# EAGLE board sensor (EAGLE 9.6.2)
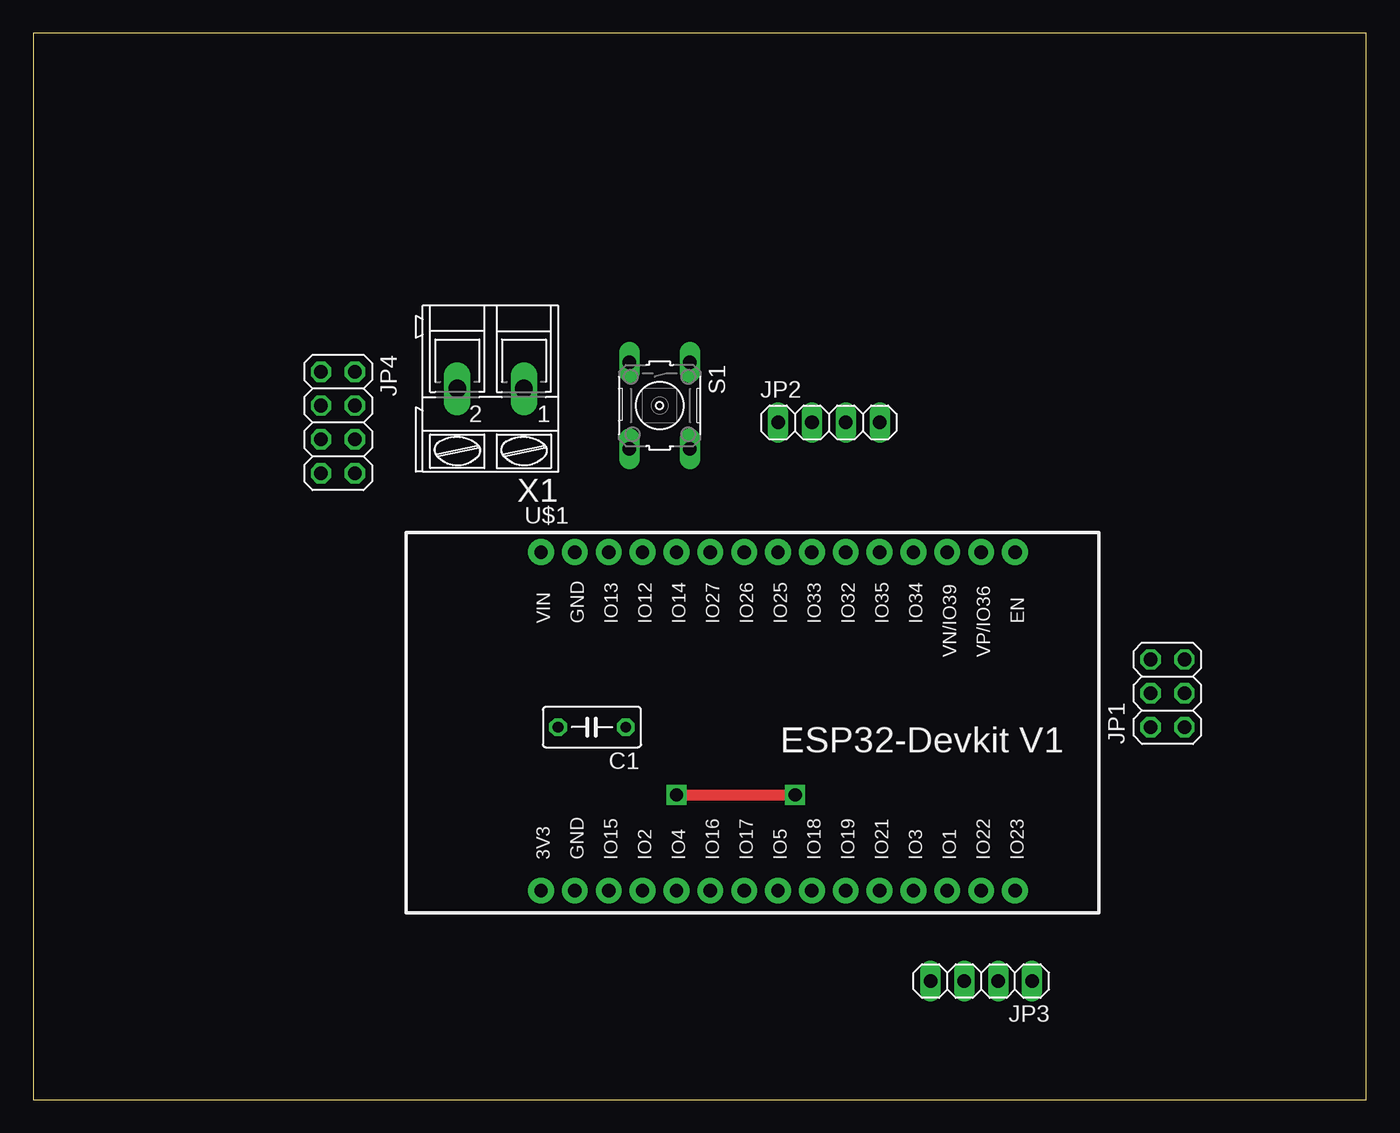
[diagram p0: board, top side]
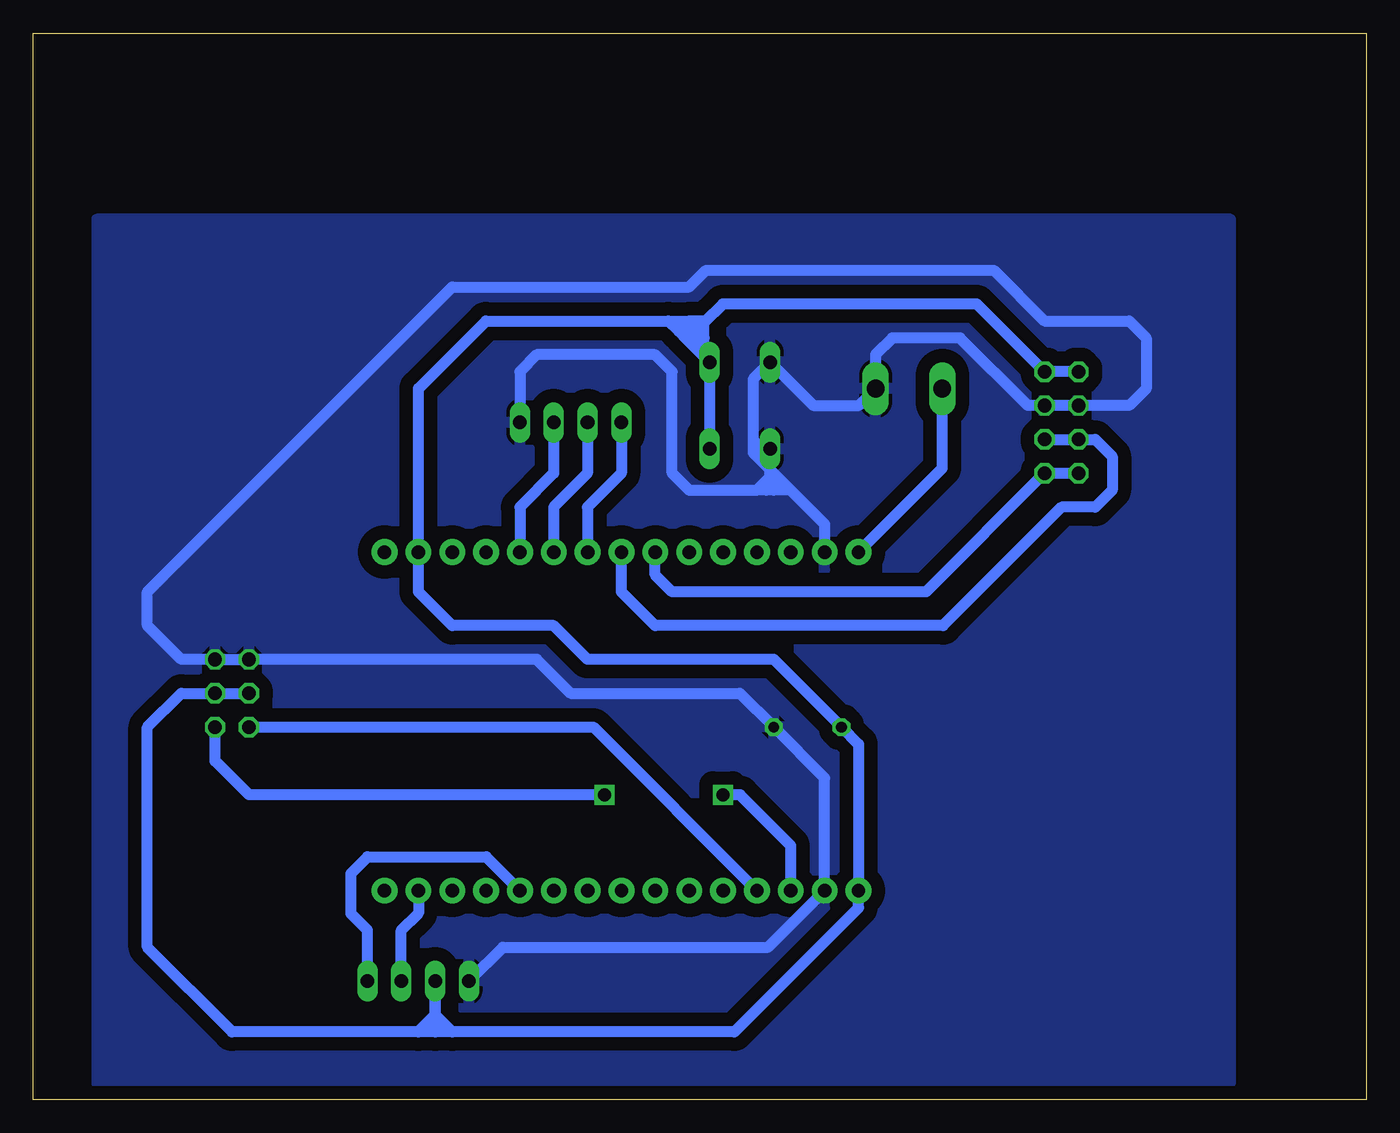
[diagram p1: board, bottom side, seen from below]

Size 100 x 80 mm. Coordinates in mm from the lower left corner, seen from the top.
Outline: 0,0 100,0 100,80 0,80 0,0
Copper layers (1*16): Top 0.035mm / dielectric 1.5mm / Bottom 0.035mm
Design rules "default": minimum track width 6mil, minimum drill 0.35mm, track to track 6mil, track to pad 6mil, pad to pad 6mil, via to via 6mil, smd to smd 6mil, copper to edge 40mil, drill to drill 6mil, minimum pad ring 10mil, minimum via ring 8mil, stop-mask expansion 4mil, vias tented up to drill 0mil, thermal gap 10mil

## Footprints (pad centres in the part's own frame; a part is rotated, then mirrored left to right if it is on the bottom)
C050-030X075 = drill 0.813 octagon: 1 -2.54,0; 2 2.54,0
2X03 = drill 1.016 octagon: 1 -2.54,-1.27; 2 -2.54,1.27; 3 0,-1.27; 4 0,1.27; 5 2.54,-1.27; 6 2.54,1.27
1X04 = drill 1.016 long: 1 -3.81,0; 2 -1.27,0; 3 1.27,0; 4 3.81,0
2X04 = drill 1.016 octagon: 1 -3.81,-1.27; 2 -3.81,1.27; 3 -1.27,-1.27; 4 -1.27,1.27; 5 1.27,-1.27; 6 1.27,1.27; 7 3.81,-1.27; 8 3.81,1.27
B3F-10XX = drill 1.016 long: 1 -3.251,2.261; 2 3.251,2.261; 3 -3.251,-2.261; 4 3.251,-2.261
ESP32-DEVKITV1 = drill 1 pad 1.93: 3V3 -16.52,-12.27; D1 13.96,-12.27; D2 -8.9,-12.27; D3 11.42,-12.27; D4 -6.36,-12.27; D5 1.26,-12.27; D12 -8.9,13.135; D13 -11.44,13.135; D14 -6.36,13.135; D15 -11.44,-12.27; D16 -3.82,-12.27; D17 -1.28,-12.27; D18 3.8,-12.27; D19 6.34,-12.27; D21 8.88,-12.27; D22 16.5,-12.27; D23 19.04,-12.27; D25 1.26,13.135; D26 -1.28,13.135; D27 -3.82,13.135; D32 6.34,13.135; D33 3.8,13.135; D34 11.42,13.135; D35 8.88,13.135; D36 16.5,13.135; D39 13.96,13.135; EN 19.04,13.135; GND@1 -13.98,13.135; GND@2 -13.98,-12.27; VIN -16.52,13.135
AK300/2 = drill 1.321 long: 1 -2.515,0; 2 2.489,0

## Placement (x,y rotation side)
C1  [C050-030X075]  41.91,27.94 180 top
JP1  [2X03]  85.09,30.48 90 top
JP2  [1X04]  59.69,50.8 0 top
JP3  [1X04]  71.12,8.89 180 top
JP4  [2X04]  22.86,50.8 270 top
S1  [B3F-10XX]  46.99,52.07 270 top
U$1  ESP32DEVKITV1  [ESP32-DEVKITV1]  54.61,27.94 0 top
X1  [AK300/2]  34.29,53.34 180 top

## Library data of the parts
C1 = rcl; SPICEPREFIX: C
JP1-JP4 = pinhead
S1 = switch-omron; MPN: B3F-1000; OC_FARNELL: 176432; OC_NEWARK: 36M3542
U$1 = esp32-devkitv1
X1 = con-ptr500; OC_FARNELL: unknown; OC_NEWARK: unknown

## Nets
GND: C1.1 JP1.5 JP1.6 JP2.4 JP3.4 JP4.3 JP4.4 S1.3 S1.4 U$1.GND@1 U$1.GND@2 X1.1
MOISTURE: JP1.2 U$1.D2
OUT1: JP2.1 U$1.D33
OUT2: JP2.2 U$1.D32
OUT3: JP2.3 U$1.D35
PH: JP1.1 U$1.D15
SCL: JP3.2 U$1.D22
SCL2: JP4.5 JP4.6 U$1.D25
SDA: JP3.1 U$1.D21
SDA2: JP4.7 JP4.8 U$1.D26
V: C1.2 JP1.3 JP1.4 JP3.3 JP4.1 JP4.2 S1.1 S1.2 U$1.3V3 U$1.D36
VIN: U$1.VIN X1.2

## Tracks (layer width: path | path; a pad name or v marks a point on that pad's centre or on a via)
GND
  Bottom 0.813: 43.18,45.72 44.45,45.72 | 44.45,45.72 45.01,45.72 | 45.72,45.72 50.8,45.72 52.07,46.99 52.07,54.61 53.34,55.88 62.23,55.88 63.5,54.61 JP2.4 | U$1.GND@1 40.63,43.17 43.18,45.72 | 46,48.54 44.73,47.27 | 43.18,45.72 43.81,46.35 | JP3.4 64.77,11.43 44.87,11.43 U$1.GND@2 40.63,24.12 C1.1 46.99,30.48 59.69,30.48 62.23,33.02 JP1.6 JP1.5 88.9,33.02 91.44,35.56 91.44,38.1 68.58,60.96 50.8,60.96 49.53,62.23 27.94,62.23 24.13,58.42 17.78,58.42 16.51,57.15 16.51,53.34 17.78,52.07 JP4.3 JP4.4 25.4,52.07 30.48,57.15 35.56,57.15 36.8,55.91 X1.1 38.08,52.07 41.48,52.07 S1.3 46,54.05 46,49.53 | 46,49.53 46,48.54 | S1.4 44.73,47.27 | S1.4 45.72,48.82 46,48.54 | S1.4 45.29,48.82 46,49.53 | 44.73,46.71 44.73,46 | 44.73,46 44.45,45.72 | 43.81,46.35 44.37,46.35 44.73,46 | 44.73,47.27 43.81,46.35 | 44.73,46 45.01,45.72 | 45.01,45.72 45.72,45.72 | 45.72,45.72 44.73,46.71 | 44.73,46.71 44.73,47.27
  pour Bottom (isolate 1.016): 95.25,1.27 10.16,1.27 10.16,66.04 78.74,66.04 95.25,66.04
MOISTURE
  Bottom 0.813: 45.72,15.24 45.71,15.25 U$1.D2 57.98,27.94 JP1.2
OUT1
  Bottom 0.813: JP2.1 55.88,46.99 58.42,44.45 U$1.D33
OUT2
  Bottom 0.813: JP2.2 58.42,46.99 60.96,44.45 U$1.D32
OUT3
  Bottom 0.813: U$1.D35 63.5,44.45 60.96,46.99 JP2.3
PH  (via drill 1 pad 0.55)
  Top 0.813: v48.26,22.86 v57.15,22.86
  Bottom 0.813: U$1.D15 43.17,19.04 46.95,22.82 | 46.95,22.82 46.95,22.86 | 46.95,22.82 46.99,22.86 v48.26,22.86 | v57.15,22.86 83.82,22.86 86.36,25.4 JP1.1
SCL
  Bottom 0.813: U$1.D22 71.11,13.98 72.39,12.7 JP3.2
SCL2
  Bottom 0.813: JP4.6 JP4.5 20.32,49.53 19.05,48.26 19.05,45.72 20.32,44.45 22.86,44.45 31.75,35.56 53.34,35.56 55.88,38.1 55.88,41.06 U$1.D25
SDA
  Bottom 0.813: U$1.D21 66.03,18.21 74.92,18.21 76.19,16.94 76.19,13.96 74.93,12.7 JP3.1
SDA2
  Bottom 0.813: JP4.7 JP4.8 33.02,38.1 52.07,38.1 53.34,39.37 53.34,41.06 U$1.D26
V
  Bottom 0.813: 52.35,58.42 66.04,58.42 71.11,53.35 U$1.D36 71.11,38.09 68.58,35.56 60.96,35.56 58.42,33.02 44.45,33.02 C1.2 38.09,26.66 U$1.3V3 38.09,14.4 47.41,5.08 68.58,5.08 | 50.94,57.01 51.58,57.65 | 51.58,57.65 52.35,58.42 | S1.2 S1.1 49.67,55.74 | 49.67,58.28 48.26,59.69 29.21,59.69 JP4.2 JP4.1 | 49.67,58.28 50.8,57.15 | 50.8,57.15 50.94,57.01 | 50.94,57.01 49.67,55.74 | 49.67,55.74 49.67,57.15 | 49.67,57.15 49.67,58.28 | 49.67,58.28 49.81,58.42 50.8,58.42 | 50.8,58.42 50.8,57.15 | 49.67,57.15 50.8,57.15 | 52.35,58.42 50.8,58.42 | 50.8,58.42 51.58,57.65 | 69.85,6.35 JP3.3 69.85,5.08 | 69.85,6.35 68.58,5.08 | 69.85,5.08 71.12,5.08 | 71.12,5.08 85.09,5.08 91.44,11.43 91.44,27.94 88.9,30.48 JP1.3 JP1.4 | 69.85,6.35 71.12,5.08 | 68.58,5.08 69.85,5.08
VIN
  Bottom 0.813: U$1.VIN 31.8,47.36 X1.2